# Altium PCB box1.PcbDoc
Units mm, origin at the board's own origin, x right, y up, seen from the top; angles counter-clockwise.
Board outline 121.79 x 26.29 mm, 2 copper layers (Top Layer, Bottom Layer); 42 components, 26 nets, 141 pads, 69 vias.
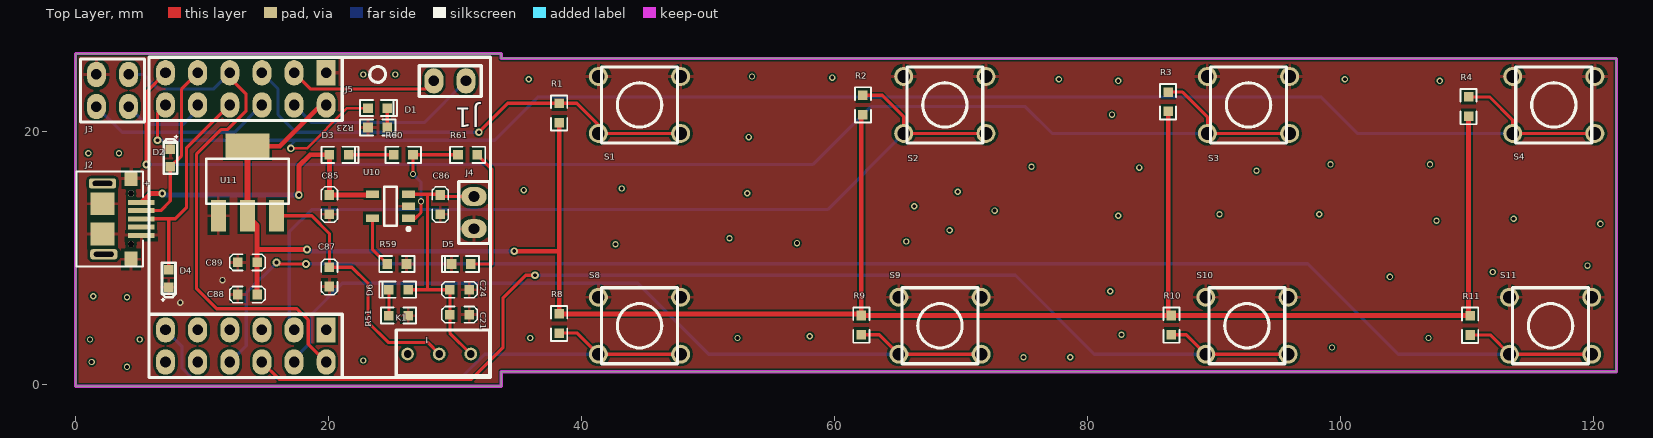
[diagram p0: Top Layer view]
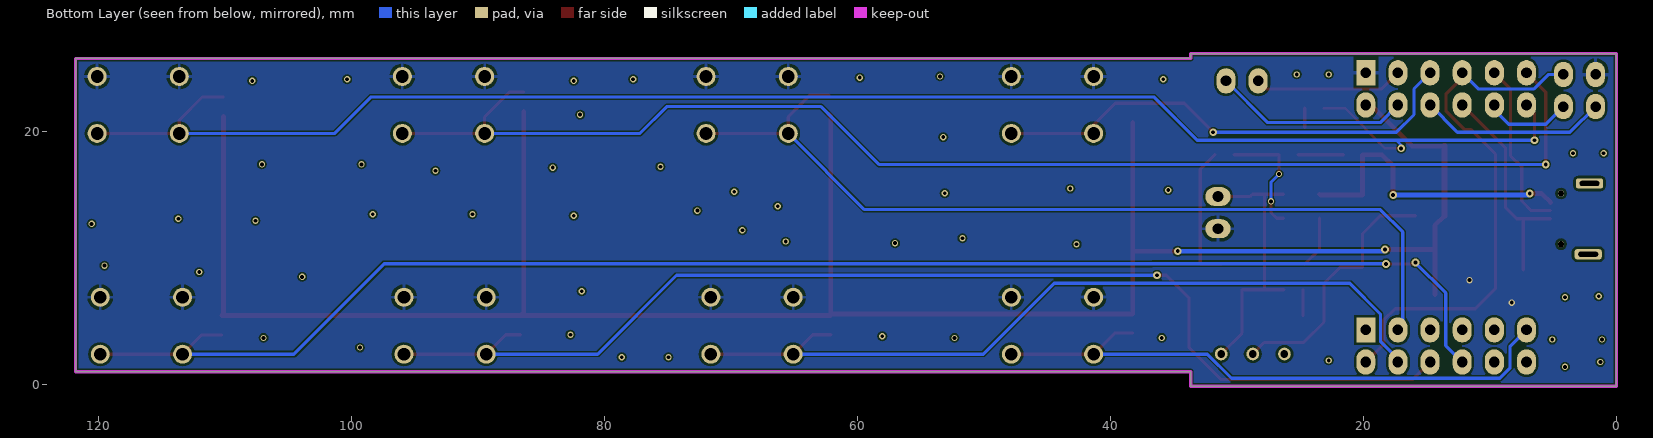
[diagram p1: Bottom Layer view, seen from below]
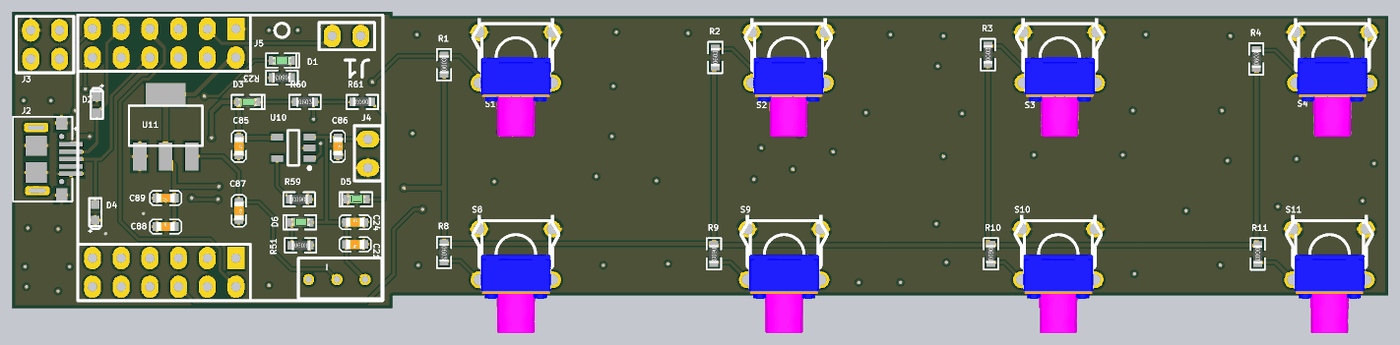
[diagram p2: 3D render of the assembled board from above, using the file's embedded part models]

## Layer stack, top to bottom
Top Solder: solder mask 0.0102, Solder Resist, Dk 3.5
Top Layer: signal copper 0.0356
Dielectric 1: dielectric 0.32, FR-4, Dk 4.8
Bottom Layer: signal copper 0.0356
Bottom Solder: solder mask 0.0102, Solder Resist, Dk 3.5

## Board outline
0,-0.127 0,26.162 33.655,26.162 33.655,25.781 121.793,25.781 121.793,1.016 33.655,1.016 33.655,-0.127

## Design rules (kind name [scope] priority, off if disabled: settings)
Clearance [All] p1: gap=0.127 except(0.2: SMDPad-Poly THPad-Poly)
PolygonConnect PolygonConnect_1 [IsVia] p1: connectstyle=Direct reliefconductorwidth=0.254 reliefentries=4 polygonreliefangle="90 Angle" airgapwidth=0.254
PolygonConnect [All] p2: connectstyle=Relief reliefconductorwidth=0.254 reliefentries=4 polygonreliefangle="90 Angle" airgapwidth=0.254
RoutingVias [All] p1: holewidth=0.3 width=0.5 viastyle="Through Hole" minholewidth=0.3 minwidth=0.5 maxholewidth=0.5 maxwidth=0.8
SolderMaskExpansion [All] p1: expansion=0.064
Width [All] p1: maxlimit=0.5 minlimit=0.203 preferedwidth=0.5
30 further rules are at their usual default settings.

## Components (designator, comment, footprint, x,y, rotation, side; value= is the part's Value field where it differs from the comment)
C21 "104K50V" C0603 31.115,5.529 r180 top
C24 "106K50V" C0603 29.591,7.493 r0 top
C85 "475K16V" C0603 20.066,14.986 r270 top
C86 "106K50V" C0603 28.829,14.986 r270 top
C87 "104K50V" C0603 20.066,9.271 r270 top
C88 "106K50V" C0603 12.827,7.112 r0 top
C89 "104K50V" C0603 14.351,9.652 r180 top
D1 "LED0603G" D-LED0603G 23.114,21.844 r0 top
D2 "ESDA_TR1/0603" HS_0603D 7.493,17.907 r270 top
D3 "LED0603G" D-LED0603G 20.066,18.161 r0 top
D4 "ESDA_TR1/0603" HS_0603D 7.366,8.382 r90 top
D5 "LED0603G" D-LED0603G 31.242,9.525 r180 top
D6 "LED0603G" D-LED0603G 26.289,7.493 r180 top
J1 "J-D2.54-1*2" D2.54-1*2P 30.861,24.003 r180 top
J2 "USB-MINI-SOCKET" "MICRO-USB - 5.9" 5.207,14.396 r270 top
J3 "J-D2.54-2*2" D2.54-2*2P 1.651,24.511 r0 top
J4 "J-D2.54-1*2" D2.54-1*2P 31.496,14.859 r270 top
J5 "CC2540" CC2540 5.812,25.868 r270 top
K1 "SS-12D00" SS-12D00 26.242,2.413 r0 top
R1 "1KF" R0603 38.227,20.701 r90 top
R2 "1KF" R0603 62.23,21.336 r90 top
R3 "1KF" R0603 86.36,21.59 r90 top
R4 "1KF" R0603 110.109,21.209 r90 top
R8 "1KF" R0603 38.227,5.588 r270 top
R9 "1KF" R0603 62.103,5.461 r270 top
R10 "1KF" R0603 86.614,5.461 r270 top
R11 "1KF" R0603 110.236,5.445 r270 top
R23 "1KF" R0603 24.638,20.32 r180 top
R51 "1KF" R0603 24.765,5.445 r0 top
R59 "R0603-15KF" R0603 26.162,9.525 r180 top
R60 "470RF" R0603 25.146,18.161 r0 top
R61 "470RF" R0603 31.75,18.161 r180 top
S1 "SKHHBVA010" S-SKHHBVA010 44.577,22.098 r180 top
S2 "SKHHBVA010" S-SKHHBVA010 68.707,22.098 r180 top
S3 "SKHHBVA010" S-SKHHBVA010 92.71,22.098 r180 top
S4 "SKHHBVA010" S-SKHHBVA010 116.84,22.098 r180 top
S8 "SKHHBVA010" S-SKHHBVA010 44.577,4.647 r180 top
S9 "SKHHBVA010" S-SKHHBVA010 68.326,4.647 r180 top
S10 "SKHHBVA010" S-SKHHBVA010 92.583,4.647 r180 top
S11 "SKHHBVA010" S-SKHHBVA010 116.586,4.647 r180 top
U10 "MCP73831" SOT23-5N 24.892,14.097 r180 top
U11 "AMS1117_3.3V" SOT-223 13.589,13.335 r0 top

## Footprints (in the part's own frame and the unit in brackets; to place one, negate y for a bottom-side part, rotate by r counter-clockwise, add the part's x,y. Pads: shape width x height; smd on the part's side, far side on the other; paste and mask are expansions set on the pad)
C0603 [mil]
  rect 30x30 smd: 1(0,0) 2(60,0)
  silkscreen extent -25,-25 85,25, body extent -1,-15 61,16, height 12
CC2540 [mm]
  rect 2x1.5 hole 0.838: 1(1.23,14) 13(21.55,14)
  oval 2x1.5 hole 0.838: 2(3.77,14) 3(1.23,11.46) 4(3.77,11.46) 5(1.23,8.92) 6(3.77,8.92) 7(1.23,6.38) 8(3.77,6.38) 9(1.23,3.84) 10(3.77,3.84) 11(1.23,1.3) 12(3.77,1.3) 14(24.09,14) 15(21.55,11.46) 16(24.09,11.46) 17(21.55,8.92) 18(24.09,8.92) 19(21.55,6.38) 20(24.09,6.38) 21(21.55,3.84) 22(24.09,3.84) 23(21.55,1.3) 24(24.09,1.3)
  silkscreen extent 0,0 25.32,26.99, body extent 0,0 25.4,15.27, height 10
D2.54-1*2P [mm]
  oval 1.5x2 hole 0.838: 1(0,0) 2(2.54,0)
  silkscreen extent -1.2,-1.2 3.7,1.23, body extent -1.1,-1.3 3.6,1.24, height 10
D2.54-2*2P [mm] "DUAL_ROW_Pin_R2.54-5P"
  oval 1.5x2 hole 0.838: 1(0,0) 2(0,-2.54) 3(2.54,0) 4(2.54,-2.54)
  silkscreen extent -1.27,-3.77 3.8,1.23, body extent -1.27,-3.82 3.8,1.26, height 10
D-LED0603G [mil]
  rect 30x30 smd: 1(0,0) 2(60,0)
  silkscreen extent -25,-25 90,25, body extent -2,-16 62,15, height 24
HS_0603D [mil]
  rect 30x30 smd: 1(-27.5,0) 2(27.5,0)
  silkscreen extent -70,-21 49,23
"MICRO-USB - 5.9" [mm]
  rrect50% 0.8x2.15 hole 0.4 slot 1.55 at 90 deg: 0(-1.5,-3.075) 0(4.1,-2.975)
  rect 0.4x2.1 smd: 1(0,0) 2(0.65,0) 3(1.3,0) 4(1.95,0) 5(2.6,0)
  rect 1.2x1 smd: 6(-1.9,-0.825) 7(4.5,-0.825)
  rect 1.8x1.9 smd: 8(0.106,-3.075) 9(2.493,-3.075)
  round 0.5 hole 0.5 unplated: ""(-0.7,-0.825) ""(3.3,-0.825)
  silkscreen extent -2.45,-5.13 5.05,0.12
R0603 [mil]
  rect 30x30 smd: 1(0,0) 2(60,0)
  silkscreen extent -25,-25 85,25, body extent 0,-16 62,15, height 18
S-SKHHBVA010 [mm]
  round 1.5 hole 1: 1(-3.25,2.25) 1(3.25,2.25) 2(-3.25,-2.25) 2(3.25,-2.25)
  silkscreen extent -3,-3 3,3, body extent -3.95,-3.1 3.95,3.1, height 7
SOT23-5N [mm] "SOT23, 5-Leads, Body 2.90x2.70mm, Pitch 0.95mm, IPC Medium Density"
  rect 1.05x0.6 smd: 1(-1.425,0.95) 2(-1.425,0) 3(-1.425,-0.95) 4(1.425,-0.95) 5(1.425,0.95)
  silkscreen extent -1.55,-1.55 0.5,1.92, body extent -0.9,-1.55 0.9,1.55, height 1.45
SOT-223 [mm]
  rect 1.2x2.5 smd: 1(-2.3,0) 2(0,0) 3(2.3,0)
  rect 3.5x2 smd: 2(0,5.5)
  silkscreen extent -3.25,0.94 3.25,4.5
SS-12D00 [mm] "SS-12D00(1P2T) 立式 柄高5MM"
  round 1 hole 0.6: 1(0,0) 2(2.5,0) 3(5,0)
  silkscreen extent -0.9,-1.7 6.5,1.9

## Part data
C21 C87 C89: library part C0603X7R-104K50V, "贴片电容-陶瓷"
C24 C86 C88: library part C0603X7R-106K50V, "贴片电容-陶瓷"
C85: library part C0603X7R-475K16V, "贴片电容-陶瓷"
D1 D3 D5 D6: library part DLED-0603-G, "贴片二极管-LED"
D2 D4: library part "D Zener", "Zener Diode"
J1 J4: library part J-D2.54-1*2单排
J2: library part J-USB-MINI-SOCKET, "USB-A卧式插座"
J3: library part J-D2.54-2*2双排, "双排排针-直针"
J5: "蓝牙主控模块的接口"
K1: library part "SS-12D00(1P2T) 立式 柄高5MM"
R1 R2 R3 R4 R8 R9 R10 R11 R23 R51: library part R0603-1KF, "贴片电阻-通用"
R59: "贴片电容-通用"
R60 R61: library part R0603-470RF, "贴片电阻-通用"
S1 S2 S3 S4 S8 S9 S10 S11: library part S-SKHHBVA010, "轻触按键"
U10: "charge IC"
U11: library part AMS1117-3.3V

## Via types
v1: diameter 0.5, hole 0.3, Top Layer to Bottom Layer, tented both sides, 58 vias
v2: diameter 0.61, hole 0.305, Top Layer to Bottom Layer, tented both sides, 11 vias

## Nets (pads, with @x,y where several pads share a name; then routed paths per layer and width w, separated by ;. In a path a pad name is that pad's centre, name@x,y a point inside that pad or via, vN(x,y) a via of type N, cw(c..) or ccw(c..) an arc to the next point about the centre after c; other vN are vias at no path point)
+3.3V: C88.2 C89.1 J5.2 R1.1 R2.1 R3.1 R4.1 R8.1 R9.1 R10.1 R11.1 U11.2 | length 178.6
  Top Layer w0.381: U11.2@13.589,13.335 14.351,12.573 14.351,10.668 ; U11.2@13.589,18.835 16.154,18.835 19.417,22.098 J5.2 ; C88.2 C89.1@14.351,9.608 ; C89.1 14.351,10.668 ; v2(18.288,10.668) 14.351,10.668 ; v2(34.671,10.541) 38.227,10.541 ; R1.1 38.227,10.541 ; R2.1 62.103,21.209 R9.1 ; R3.1 86.36,5.715 R10.1 ; R4.1 110.109,5.572 R11.1@110.22,5.461 ; R11.1 R11.1@110.22,5.461 ; 38.227,10.541 R8.1 61.976,5.588 R9.1 ; R9.1 R10.1 ; R10.1 R11.1@110.22,5.461
  Top Layer w0.5: U11.2@13.589,13.335 U11.2@13.589,18.835
  Bottom Layer w0.381: v2(18.288,10.668) 18.415,10.541 v2(34.671,10.541)
BT2: C21.2 C24.1 C86.1 D6.1 J4.1 K1.3 U10.3 | length 21.9
  Top Layer w0.254: D6.1 27.813,7.493 ; U10.3 27.813,15.047 ; K1.3 29.591,4.064 C21.2 C24.1 27.813,7.493 ; J4.1 28.956,14.859 C86.1 28.768,15.047 27.813,15.047 ; 27.813,7.493 27.813,15.047
DC: J1.2 J5.3 | length 11.8
  Top Layer w0.254: J5.3 18.542,23.368 27.686,23.368 J1.2
DD: J1.1 J5.4 | length 15.5
  Bottom Layer w0.254: J5.4 18.669,20.701 27.559,20.701 J1.1
DIN: J3.3 J5.7 J5.14 | length 42.3
  Top Layer w0.254: J5.7 12.192,24.257 13.462,22.987 13.462,21.59 12.04,20.168 11.532,20.168 9.55,18.186 9.55,7.595 11.151,5.994 17.501,5.994 18.39,5.105 18.39,3.2 J5.14
  Bottom Layer w0.254: J3.3 5.367,24.511 6.51,23.368 10.922,23.368 J5.7
DM: D2.2 J2.2 J5.9 | length 13.6
  Top Layer w0.254: J2.2 6.731,13.746 7.493,14.508 D2.2 8.382,18.098 8.382,23.368 J5.9
DOUT: J3.2 J5.6 | length 14.8
  Bottom Layer w0.254: J3.2 3.683,19.939 12.573,19.939 J5.6
DP: D4.2 J2.3 J5.8 | length 17.5
  Top Layer w0.254: J2.3 7.366,13.096 ; D4.2 7.366,13.096 ; J5.8 8.763,18.669 8.763,13.97 7.889,13.096 7.366,13.096
GND: C21.1 C24.2 C85.2 C86.2 C87.2 C88.1 C89.2 D2.1 D4.1 D5.2 J2.5 J2.6 J2.7 J2.8 J2.9 J3.1 J4.2 J5.1 R23.2 R51.2 R59.1 S1.2 S2.2 S3.2 S4.2 S8.2 S9.2 S10.2 S11.2 U10.2 U11.1
  other v1: 8.272,6.477 11.612,8.255
NetD1_2: D1.2 R23.1 | length 1.5
  Top Layer w0.254: R23.1 D1.2
NetD3_2: D3.2 R60.1 | length 3.6
  Top Layer w0.254: D3.2 R60.1
NetD5_1: D5.1 R61.1 | length 10.8
  Top Layer w0.254: D5.1 32.893,9.525 32.893,17.018 R61.1
NetD6_2: D6.2 R51.1 | length 2
  Top Layer w0.254: R51.1 D6.2
NetR59_2: R59.2 U10.5 | length 4.1
  Top Layer w0.254: U10.5 23.467,10.696 R59.2
NetR60_2: R60.2 R61.2 U10.1 | length 9.6
  Top Layer w0.254: U10.1 26.863,13.147 27.305,13.589 v1(27.305,14.478) ; v1(26.67,16.637) R60.2 R61.2
  Bottom Layer w0.254: v1(26.67,16.637) 27.305,16.002 v1(27.305,14.478)
P1: J5.15 R2.2 S2.1 | length 71.4
  Top Layer w0.254: R2.2 63.754,22.86 65.457,21.157 65.457,19.848 S2.1@71.957,19.848
  Bottom Layer w0.254: J5.15 16.891,4.699 16.891,12.065 18.656,13.83 59.439,13.83 S2.1@65.457,19.848
P2: J5.16 R9.2 S9.1 | length 64.2
  Top Layer w0.254: R9.2 63.536,3.937 65.076,2.397 S9.1@71.576,2.397
  Bottom Layer w0.254: J5.16 17.272,2.032 18.656,3.416 18.656,5.575 21.082,8.001 44.45,8.001 50.054,2.397 S9.1@65.076,2.397
P4: J5.18 R10.2 S10.1 | length 93.3
  Top Layer w0.254: J5.18 16.104,0.406 31.293,0.406 33.782,2.896 33.782,6.833 35.585,8.636 v2(36.322,8.636) ; R10.2 87.793,3.937 89.333,2.397 S10.1@95.833,2.397
  Bottom Layer w0.254: v2(36.322,8.636) 74.295,8.636 80.534,2.397 S10.1@89.333,2.397
P6: J5.20 R11.2 S11.1 | length 120.2
  Top Layer w0.254: v2(15.889,9.638) 15.889,9.525 v2(18.212,9.525) ; R11.2 111.812,3.921 113.336,2.397 S11.1@119.836,2.397
  Bottom Layer w0.254: J5.20 13.49,3.076 13.49,7.239 v2(15.889,9.638) ; v2(18.212,9.525) 18.186,9.55 36.701,9.55 36.71,9.541 97.393,9.541 104.537,2.397 S11.1@113.336,2.397
P11: J5.23 R8.2 S8.1 | length 47.9
  Top Layer w0.254: R8.2 39.66,4.064 41.327,2.397 S8.1@47.827,2.397
  Bottom Layer w0.254: J5.23 8.406,3.024 8.406,1.318 9.226,0.499 30.43,0.499 32.328,2.397 S8.1@41.327,2.397
P13: D1.1 J5.12 R4.2 S4.1 | length 132.8
  Top Layer w0.203: v2(17.018,18.669) 18.288,18.669 21.463,21.844 D1.1
  Top Layer w0.254: v2(6.477,19.304) 6.477,21.463 J5.12 ; R4.2 111.76,22.733 113.59,20.903 113.59,19.848 S4.1@120.09,19.848
  Bottom Layer w0.203: v2(17.018,18.669) 17.018,18.923 17.399,19.304
  Bottom Layer w0.254: v2(6.477,19.304) 17.399,19.304 33.147,19.304 36.576,22.733 98.425,22.733 101.31,19.848 S4.1@113.59,19.848
P14: J5.11 R3.2 S3.1 | length 106.2
  Top Layer w0.254: v2(5.588,17.399) 5.588,23.114 J5.11 ; R3.2 87.503,23.114 89.46,21.157 89.46,19.848 S3.1@95.96,19.848
  Bottom Layer w0.254: v2(5.588,17.399) 58.293,17.399 62.865,21.971 75.057,21.971 77.18,19.848 S3.1@89.46,19.848
P20: J5.5 R1.2 S1.1 | length 38.6
  Top Layer w0.254: v2(31.877,19.939) 34.163,22.225 R1.2 39.624,22.225 41.327,20.522 41.327,19.848 S1.1@47.827,19.848
  Bottom Layer w0.254: J5.5 16.002,23.368 16.002,21.336 17.399,19.939 v2(31.877,19.939)
SCLK: J3.4 J5.10 | length 6.9
  Bottom Layer w0.254: J3.4 5.588,20.574 8.509,20.574 9.652,21.717 J5.10
VBUS: C85.1 D3.1 J2.1 U10.4 | length 24.5
  Top Layer w0.381: J2.1 5.907,15.096 v2(6.858,15.096) ; v2(17.653,14.986) 17.653,17.272 18.542,18.161 D3.1 C85.1 23.406,14.986 U10.4
  Bottom Layer w0.381: v2(6.858,15.096) 6.968,14.986 v2(17.653,14.986)
VIN: C87.1 K1.2 U11.3 | length 20.7
  Top Layer w0.254: U11.3 18.669,13.335 20.066,11.938 C87.1 21.844,9.271 23.114,8.001 23.114,4.937 24.721,3.33 27.825,3.33 K1.2
pads on no net: J2. J2.0 J2.4 J5.13 J5.17 J5.19 J5.21 J5.22 J5.24 K1.1
copper on no net:
  other v1: 4.064,1.397 1.27,1.778 22.733,1.905 74.93,2.159 78.613,2.159 99.314,2.921 1.143,3.556 5.08,3.556 35.941,3.683 52.324,3.683 106.934,3.683 58.039,3.81 82.677,3.937 4.064,6.897 1.397,6.985 81.788,7.366 103.886,8.509 112.014,8.89 119.507,9.398 42.672,11.096 57.023,11.176 65.659,11.303 51.689,11.557 69.088,12.192 120.523,12.7 107.569,12.954 113.665,13.096 82.423,13.335 90.424,13.462 98.298,13.462 72.644,13.746 66.294,14.097 53.086,15.113 69.723,15.24 35.433,15.367 43.18,15.494 93.345,16.891 84.074,17.145 75.565,17.209 99.187,17.399 107.061,17.399 1.016,18.288 3.429,18.288 53.213,19.558 81.915,21.336 82.423,24.003 107.823,24.003 35.814,24.13 77.724,24.13 100.33,24.13 59.817,24.257 53.467,24.348 22.733,24.511 25.273,24.511

## Polygon pours and split planes (outlines as drawn)
GND on Bottom Layer "GND_L02_P052" (solid, remove dead copper, pour order 52): 0,-0.127 0,26.162 121.412,26.162 121.793,25.781 121.92,25.654 121.92,0 0.127,0 0,-0.127
no net on Bottom Layer "Bottom Layer-No Net 1" (solid, pour order 18): 8.153,-1.27
no net on Bottom Layer "Bottom Layer-No Net 2" (solid, pour order 16): 4.445,-1.016
GND on Top Layer "GND_L01_P050" (solid, remove dead copper, pour order 50): 0,-0.127 0,26.162 121.412,26.162 121.793,25.781 121.793,1.016 121.793,0.127 121.92,0 0.254,0 0.127,-0.127

## Keep-outs
Keep-Out Layer:
  the board outline again, w0.254

## Text inside footprints (layer, text, board x,y; h text height)
J2: Top Overlay "+" at 5.459,16.109 h0.4 r270
K1: Top Overlay "I" at 27.667,3.263 h0.5